# Altium PCB FLS ADC_A.PcbDoc (part 2 of 2)
Units mil, origin at the board's own origin, x right, y up, seen from the top; angles counter-clockwise.
Board outline 3421.65 x 2339.32 mil, 6 copper layers (Top Layer, Internal Plane 1, Mid-Layer 1, Mid-Layer 2, Internal Plane 2, Bottom Layer), stack 56.9 mil thick; 63 components, 71 nets, 345 pads, 98 vias.
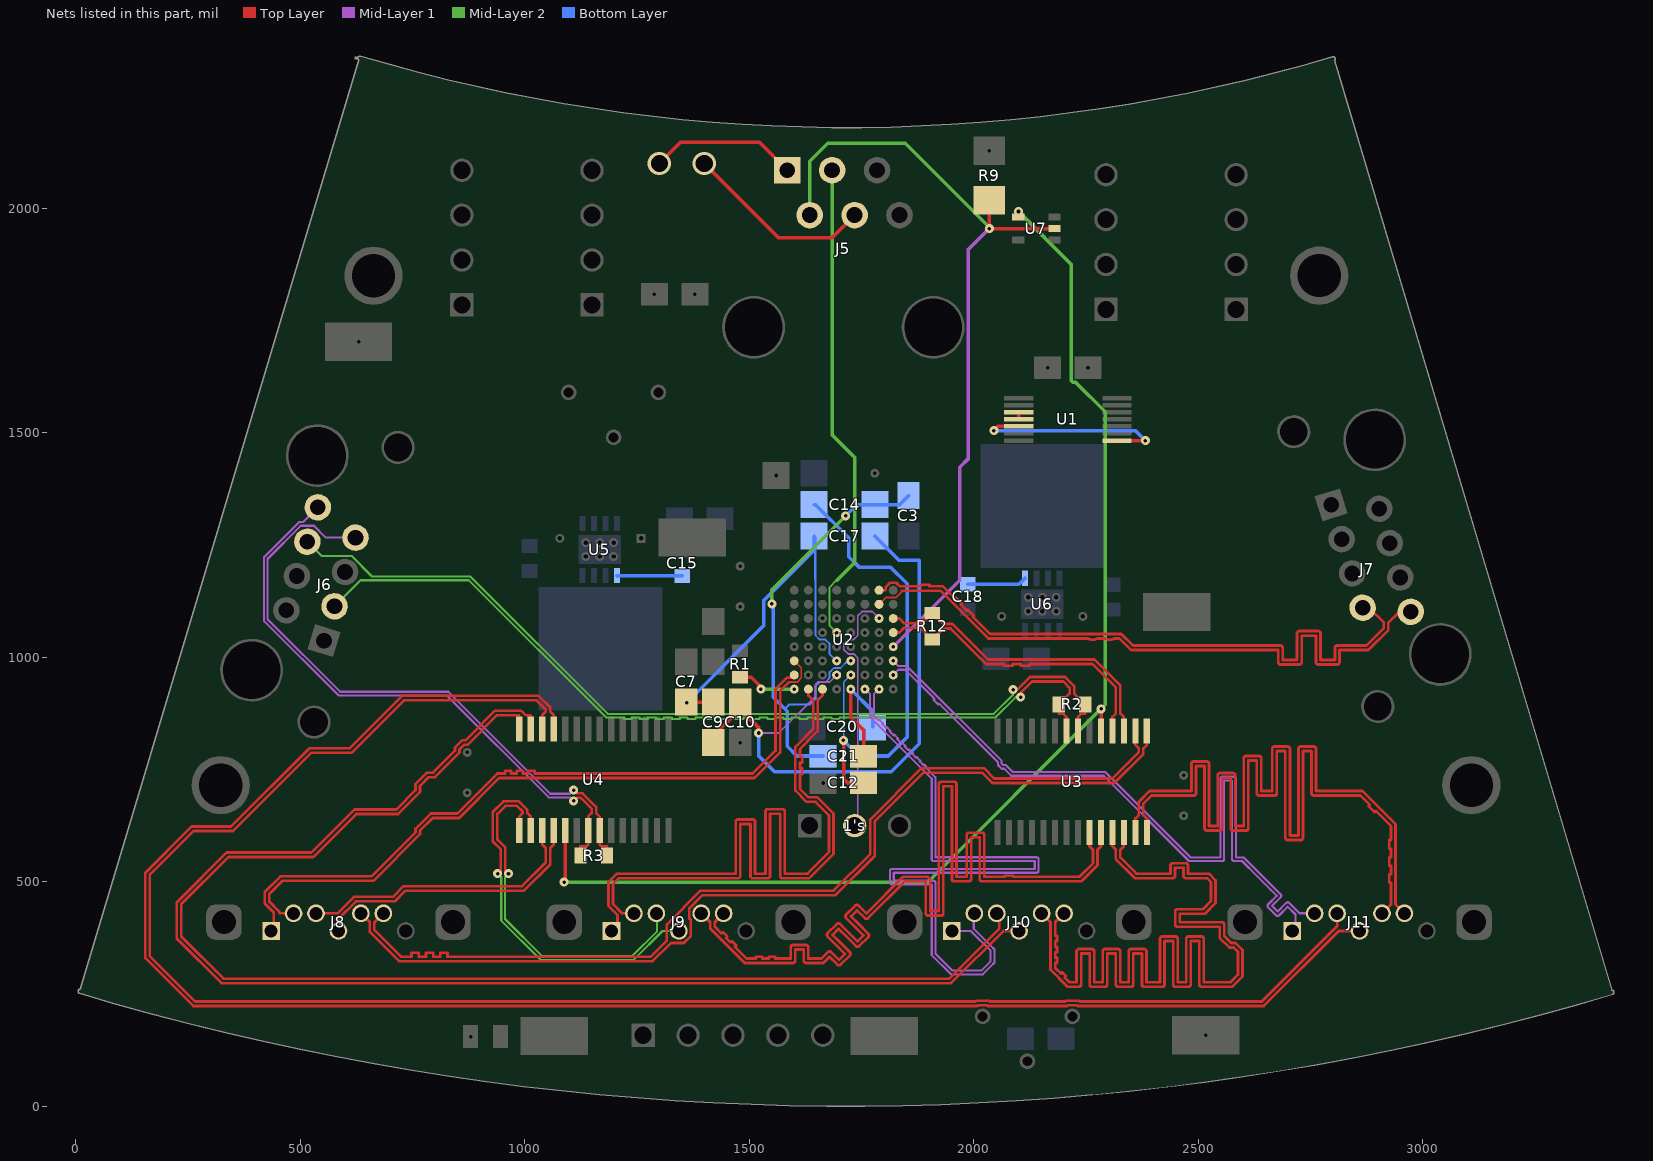
[diagram p6: the nets of this part, all layers, seen from the top]

## Via types
v1: diameter 52, hole 38, Top Layer to Bottom Layer, 52 vias
v2: diameter 20, hole 8, Top Layer to Bottom Layer, 35 vias
v3: diameter 18, hole 8, Top Layer to Bottom Layer, 10 vias
v4: diameter 22, hole 12, Top Layer to Bottom Layer, 1 vias

## Nets (pads, with @x,y where several pads share a name; then routed paths per layer and width w, separated by ;. In a path a pad name is that pad's centre, name@x,y a point inside that pad or via, vN(x,y) a via of type N, cw(c..) or ccw(c..) an arc to the next point about the centre after c; other vN are vias at no path point) (continued)
LVDS_CHANNEL_4_N: J7.7 U2.A7 | length 1484.4
  Top Layer w6.05: U2.A7@1789.49,1149.49 1802.72,1149.49 1804.46,1151.23 1804.46,1156.33 1814.14,1166.01 1827.83,1166.01 1835.81,1158.03 1836.34,1158.55 1882.77,1158.55 1882.77,1161.55 1901.82,1161.55 1901.82,1158.55 1930.39,1158.55 1958.33,1130.62 1960.45,1132.74 1973.92,1119.27 1971.8,1117.15 1985.27,1103.68 1987.39,1105.8 2000.86,1092.33 1998.74,1090.21 2037,1051.94 2329.06,1051.94 2354.89,1026.11 2683.65,1026.11 cw(c2683.65,1021.08) 2688.68,1021.08 2688.68,993.91 2720.72,993.91 2720.72,1053.28 cw(c2725.75,1053.28) 2725.75,1058.31 2767.85,1058.31 cw(c2767.85,1053.28) 2772.88,1053.28 2772.88,993.91 2804.93,993.91 2804.93,1021.08 cw(c2809.95,1021.08) 2809.95,1026.11 2875.11,1026.11 2914,1065 2914,1077 2880.78,1110.22 J7.7@2866.73,1110.22
LVDS_CHANNEL_4_P: J7.8 U2.B7 | length 1484.8
  Top Layer w4.25: U2.B7@1789.49,1117.99 1805.11,1133.62 1827.21,1133.62 1840,1146.41 1840,1148
  Top Layer w6.05: 1840,1148 1840.5,1148.5 1926.23,1148.5 2032.84,1041.89 2255.85,1041.89 ccw(c2265.38,1055.51) 2274.9,1041.89 2293.95,1041.89 ccw(c2303.47,1055.51) 2313,1041.89 2324.89,1041.89 2350.73,1016.06 2678.62,1016.06 2678.62,988.88 ccw(c2683.65,988.88) 2683.65,983.86 2725.75,983.86 ccw(c2725.75,988.88) 2730.78,988.88 2730.78,1048.26 2762.83,1048.26 2762.83,988.88 ccw(c2767.85,988.88) 2767.85,983.86 2809.95,983.86 ccw(c2809.95,988.88) 2814.98,988.88 2814.97,1016.06 2879.27,1016.06 2924.05,1060.84 2924.05,1077 2948.25,1101.2 J7.8@2974.06,1101.2
Net1's_2: 1's.2 U2.C7 | length 568
  Mid-Layer 1 w3.9: 1's.2@1735,625 1741.95,631.95 1741.95,998.41 1732.9,1007.46 1720.69,1007.46 1711.05,1017.1 1711.05,1029.9 1720.1,1038.95 1732.3,1038.95 1741.95,1048.6 1741.95,1092.3 1751.59,1101.95 1774.04,1101.95 U2.C7@1789.49,1086.5
NetC3_1: C3.1 C14.2 C21.1 U2.F5 | length 1058
  Mid-Layer 2 w8: v2(1550.72,1119) 1550.72,1150.72 v2(1715,1315)
  Bottom Layer w4: 1647.8,908.52 1647.8,935.52 1657.09,944.81 1670.1,944.81 1679.3,954.01 1679.3,967.02 1688.5,976.21 1703.62,976.21 1719.41,992.01 U2.F5@1726.5,992.01
  Bottom Layer w5: 1579.5,885 1589.5,895 1635,895 1648.16,908.16
  Bottom Layer w8: v2(1550.72,1119) 1553.75,1115.97 1553.75,910.75 1579.5,885 1585,879.5 1585,801.87 1606.87,780 C21.1@1665,780 ; v2(1715,1315) 1740,1340 C14.2@1780,1340 1835,1340 C3.1@1855,1360
NetC7_1: C7.1 C9.1 C17.2 U2.F4 | length 876.2
  Top Layer w8: C7.1@1360,921 C7.1@1360,900 C9.1@1420,900
  Bottom Layer w4: 1647.35,1175 1647.8,1174.55 1647.8,1048.5 1657,1039.3 1669.92,1039.3 1679.21,1030.01 1679.21,1017 1678.85,1016.64 1678.85,1008.16 U2.F4@1695,992.01
  Bottom Layer w5: C17.2@1645,1270 1647.35,1267.65 1647.35,1175
  Bottom Layer w8: v2(1361,899) 1532.72,1070.72 1532.72,1126.46 1645,1238.74 C17.2@1645,1270
NetC9_2: C9.2 C10.2 C17.1 U2.G4 | length 1407.8
  Top Layer w8: C9.2@1420,810 1420,825 C10.2@1480,884.72 ; C10.2@1480,900 C10.2@1480,884.72 ; v2(1521,831.28) 1521,843.72 C10.2@1480,884.72
  Mid-Layer 1 w4: v2(1521,831.28) 1566.28,831.28 1648,913 1648,940 1653,945 1679.49,945 U2.G4@1695,960.51
  Bottom Layer w8: v2(1521,831.28) 1521,780.72 1556.72,745 1816.72,745 1879,807.28 1879,1215.72 1834.28,1215.72 C17.1@1780,1270
NetC11_1: C11.1 C20.1 U2.H5 | length 264.9
  Top Layer w8: U2.H5@1726.5,929.02 1726.5,866.5 1755,838 C11.1@1755,780
  Bottom Layer w8: U2.H5@1726.5,929.02 1775,880.51 C20.1@1775,845
NetC12_2: C12.2 C14.1 C21.2 U2.G5 | length 1106.7
  Top Layer w8: v2(1710,815) 1710.72,814.28 1710.72,729 1719.72,720 C12.2@1755,720
  Bottom Layer w4: v2(1710,815) 1711,816 1711,945.01 U2.G5@1726.5,960.51
  Bottom Layer w8: C14.1@1645,1340 1647.73,1340 1721.72,1266.01 1721.72,1224 1744.72,1201 1814.72,1201 1852,1163.72 1852,822.28 1809.72,780 C21.2@1755,780 1745,780 v2(1710,815)
NetC15_1: C15.1 U5.5 | length 145.8
  Bottom Layer w8: U5.5@1205.39,1181.93 1350.51,1181.93 C15.1@1351,1181.44
NetC18_1: C18.1 U6.5 | length 133.2
  Bottom Layer w8: C18.1@1987,1162.56 2101.1,1162.56 U6.5@2114.61,1176.07
NetR1_2: R1.2 U2.H1 | length 129.3
  Top Layer w8: R1.2@1480,955.47 1504.72,955.47 v2@1525,935.19
  Mid-Layer 2 w8: v2@1525,930 v2(1525.98,929.02) U2.H1@1600.51,929.02
NetU1_3: U1.3 U1.4 | length 15.7
  Top Layer w8: U1.4@2100.75,1530 U1.3@2100.75,1545.75
NetU1_5: U1.5 U1.8 | length 470.1
  Top Layer w8: v2(2045,1505) 2054.25,1514.25 U1.5@2100.75,1514.25 ; U1.8@2319.25,1482.76 v2(2382.76,1482.76)
  Bottom Layer w8: v2(2045,1505) 2360.51,1505 v2(2382.76,1482.76)
PDWN: J5.2 R9.2 U2.E8 U7.2 | length 1845.4
  Top Layer w8: R9.2@2035,2017.88 v2(2035,1955) U7.2@2180.35,1955
  Mid-Layer 1 w8: U2.E8@1820.98,1023.5 1969,1171.52 1969,1423 1987.75,1441.75 1987.75,1907.75 v2(2035,1955)
  Mid-Layer 2 w8: J5.2@1635,1985 1635,2105 1675,2145 1848,2145 2035,1958 v2(2035,1955)
PDWN2: U3.5 U4.5 U7.4 | length 2716.3
  Top Layer w8: v2(1088,499) 1090.36,501.36 U4.5@1090.36,614 ; U3.5@2283.64,836 2284,836.36 v2(2284,885)
  Mid-Layer 2 w8: v2(1088,499) 1898,499 v2(2284,885) 2293.06,894.06 2293.06,1547.04 2227.85,1612.25 2221.79,1612.25 2217.25,1616.79 2217.25,1875.75 v2(2100,1993)
"PLL LOCK_A": J5.3 U2.D4 | length 1080.6
  Mid-Layer 2 w4: 1679.25,1156.02 1694.42,1171.19 1695,1171.19 ; 1679.3,1155.97 1679.3,1070.7 U2.D4@1695,1055
  Mid-Layer 2 w8: J5.3@1685,2085 1685,1495 1735,1445 1735,1211.19 1695,1171.19
START_A1_N: J8.4 U4.4 | length 627.7
  Top Layer w6.05: J8.4@585.12,390.32 585.12,417.46 624.05,456.4 710.61,456.4 734.21,480 998.21,480 1057,538.79 1057,575.23 1064.77,583 U4.4@1064.77,614
START_A1_P: J8.3 U4.3 | length 633
  Top Layer w6.05: J8.3@535.12,429.69 583.13,429.69 619.89,466.45 706.45,466.45 730.05,490.05 994.05,490.05 1046.95,542.95 1046.95,575.23 1039.18,583 U4.3@1039.18,614
START_A2_N: J9.4 U4.2 | length 857.9
  Top Layer w6.05: v2(940,518) 946.98,524.97 946.98,571.81 928.95,589.84 928.95,655.16 952.84,679.05 986.93,679.05 1005.82,660.16 1005.82,652.77 1013.59,645 U4.2@1013.59,614
  Mid-Layer 2 w4.8: v2(940,518) 947.85,510.15 947.85,413.41 1033.13,328.13 1035.56,325.7 1242.44,325.7 1244.87,328.13 1307.05,390.32 J9.4@1343.37,390.32
START_A2_P: J9.3 U4.1 | length 799.3
  Top Layer w6.05: v2(964,518) 957.03,524.97 957.03,575.97 939,594 939,651 957,669 982.77,669 995.77,656 995.77,652.77 988,645 U4.1@988,614
  Mid-Layer 2 w4.8: v2(964,518) 956.15,510.15 956.15,416.85 1039,334 1239,334 1295,390 1295,428.06 J9.3@1293.37,429.69
START_A3_N: J10.4 U4.27 | length 3059.2
  Top Layer w6.05: U4.27@1013.59,840.38 1013.59,871 1002.21,871 992.16,881.05 934.05,881.05 868.08,815.08 860.79,815.08 844.92,799.21 844.92,791.92 796.08,743.08 782.16,743.08 756.92,717.84 756.92,703.92 714,661 620.95,661 525,565.05 335.84,565.05 224.95,454.16 224.95,373.84 324.84,273.95 1950.16,273.95 2066.53,390.32 J10.4@2101.63,390.32
START_A3_P: J10.3 U4.28 | length 2986.2
  Top Layer w6.05: U4.28@987.99,840.38 987.99,871 938.21,871 872.24,805.03 864.95,805.03 854.97,795.05 854.97,787.76 800.24,733.03 786.32,733.03 766.97,713.68 766.97,699.76 718.16,650.95 625.11,650.95 529.16,555 340,555 235,450 235,378 329,284 1946,284 2057,395 2057,424.31 J10.3@2051.63,429.69
START_A4_N: J11.4 U4.25 | length 4138.2
  Top Layer w6.05: U4.25@1064.77,840.38 1064.77,871 1057,878.77 1057,888.16 1031.11,914.05 726.84,914.05 609.89,797.11 520.11,797.11 346,623 258,623 155.06,520.06 155.06,329.73 261.84,222.95 2008.27,222.95 2009.84,224.53 2030.16,224.53 2031.73,222.95 2208.27,222.95 2209.84,224.53 2230.16,224.53 2231.73,222.95 2646.16,222.95 2813.53,390.32 J11.4@2859.88,390.32
START_A4_P: J11.3 U4.26 | length 4067.2
  Top Layer w6.05: U4.26@1039.18,840.38 1039.18,871 1046.95,878.77 1046.95,884 1026.95,904 731,904 614.06,787.06 524.27,787.06 350.16,612.95 262.16,612.95 165.11,515.89 165.11,333.89 266,233 2004.1,233 2005.68,234.58 2034.32,234.58 2035.9,233 2204.1,233 2205.68,234.58 2234.32,234.58 2235.9,233 2642,233 2809.88,400.88 J11.3@2809.88,429.69
START_A_N: J6.7 R3.1 U4.8 | length 1409.4
  Top Layer w6.05: v2(1109,704) 1115.98,697.03 1129.16,697.03 1159.36,666.82 1159.36,652.77 1167.13,645 U4.8@1167.13,614 1167.13,583 1171.13,579 1183.53,579 R3.1@1183.53,558
  Mid-Layer 1 w4.8: J6.7@623.17,1266.51 556.93,1266.51 530.52,1292.93 501.17,1292.93 427.24,1219 427.24,1085.06 589,923.3 829.7,923.3 1056.85,696.15 1101.15,696.15 v2(1109,704)
START_A_P: J6.8 R3.2 U4.7 | length 1339.6
  Top Layer w6.05: v2(1109,680) 1115.98,686.97 1125,686.97 1149.31,662.66 1149.31,652.77 1141.54,645 U4.7@1141.54,614 1141.54,583 1137.54,579 1124.47,579 R3.2@1124.47,558
  Mid-Layer 1 w4.8: J6.8@539.23,1334 506.46,1301.23 497.73,1301.23 418.94,1222.44 418.94,1081.62 585.56,915 826.26,915 1053.41,687.85 1101.15,687.85 v2(1109,680)
SYS_CLK_A1_N: J8.6 U3.2 | length 2152
  Top Layer w6.05: J8.6@685.12,429.69 665.14,409.71 665.14,392 724.14,333 748.03,333 748.03,342 764.08,342 764.08,333 780.12,333 780.12,342 796.17,342 796.17,333 812.23,333 812.23,342 828.28,342 828.28,333 1281,333 1316.66,368.66 1316.66,404.96 1391.75,480.05 1688.05,480.05 1770,562 1770,639 1884.05,753.05 2022.95,753.05 2046,730 2309.18,730 2368.18,789 2368.18,797.23 2360.41,805 U3.2@2360.41,836
SYS_CLK_A1_P: J8.5 U3.1 | length 2150.9
  Top Layer w6.05: J8.5@635.12,429.69 655.09,409.71 655.09,387.84 719.98,322.95 1285.16,322.95 1325.82,363.61 1354.44,363.61 1370.08,379.25 1370.08,415.2 1366.66,418.62 1366.66,440.75 1395.91,470 1692.21,470 1780.05,557.84 1780.05,634.84 1888.21,743 2018.79,743 2041.84,719.95 2313.34,719.95 2378.23,784.84 2378.23,797.23 2386,805 U3.1@2386,836
SYS_CLK_A2_N: J9.6 U3.23 | length 2151.1
  Top Layer w6.05: J9.6@1443.37,429.69 1423.4,409.71 1423.4,400 1438.67,384.73 1441.49,387.56 1451.43,377.62 1448.6,374.8 1458.54,364.86 1461.36,367.69 1471.3,357.76 1468.47,354.93 1494.4,329 1515.47,329 1515.47,333 1529.52,333 1529.52,329 1543.57,329 1543.57,333 1557.62,333 1557.62,329 1592.53,329 1592.53,353.97 cw(c1597.55,353.97) 1597.55,359 1626.65,359 cw(c1626.65,353.97) 1631.68,353.97 1631.68,329 1661,329 1675.5,343.5 cw(c1679.06,339.96) 1682.62,343.5 1700.28,325.85 1713.75,339.32 1696.09,356.97 ; 1696.09,356.98 1674.88,378.18 cw(c1678.43,381.75) 1674.86,385.29 1695.44,405.87 cw(c1699,402.32) 1702.56,405.87 1723.76,384.67 1741.43,367 1754.9,380.47 1737.24,398.13 1716.04,419.34 cw(c1719.58,422.9) 1716.02,426.44 1736.59,447.02 cw(c1740.16,443.48) 1743.72,447.02 1761.37,429.37 1843.05,511.05 1897.62,511.05 1903.68,505 1903.68,434.64 1922.72,434.64 1922.72,717.71 cw(c1927.75,717.71) 1927.75,722.73 1956.85,722.73 cw(c1956.85,717.71) 1961.88,717.71 1961.88,511.05 1984.53,511.05 1984.53,604.35 cw(c1989.55,604.35) 1989.55,609.38 2018.65,609.38 cw(c2018.65,604.35) 2023.68,604.35 2023.68,511.05 2069.53,511.05 2069.53,513.05 2088.58,513.05 2088.58,511.05 2236.05,511.05 2265.82,540.82 2265.82,571.23 2258.05,579 U3.23@2258.05,609.62
SYS_CLK_A2_P: J9.5 U3.24 | length 2149.9
  Top Layer w6.05: J9.5@1393.37,429.69 1413.35,409.71 1413.35,395.84 1490.23,318.95 1597.55,318.95 ccw(c1597.55,323.97) 1602.58,323.97 1602.58,348.95 1621.62,348.95 1621.62,323.97 ccw(c1626.65,323.97) 1626.65,318.95 1665.16,318.95 1679.06,332.85 1696.71,315.2 ccw(c1700.28,318.74) 1703.82,315.18 1724.4,335.76 ccw(c1720.85,339.32) 1725.88,339.32 ccw(c1720.85,339.32) 1724.41,342.86 ; 1703.19,364.09 1685.53,381.75 1699,395.22 1716.65,377.57 1737.87,356.35 ccw(c1741.43,359.9) 1744.97,356.33 1765.55,376.91 ccw(c1762.01,380.47) 1767.03,380.47 ccw(c1762.01,380.47) 1765.57,384.02 ; 1703.2,364.08 1724.4,342.88 ; 1765.55,384.04 1744.35,405.23 1726.69,422.9 1740.16,436.37 1757.81,418.72 ccw(c1761.37,422.26) 1764.91,418.7 1847.21,501 1893.46,501 1893.62,500.84 1893.62,429.61 ccw(c1898.65,429.61) 1898.65,424.59 1927.75,424.59 ccw(c1927.75,429.61) 1932.78,429.61 1932.78,712.68 1951.83,712.68 1951.83,506.03 ccw(c1956.85,506.03) 1956.85,501 1989.55,501 ccw(c1989.55,506.03) 1994.58,506.03 1994.58,599.33 2013.62,599.33 2013.62,506.03 ccw(c2018.65,506.03) 2018.65,501 2240.21,501 2275.87,536.66 2275.87,571.23 2283.64,579 U3.24@2283.64,609.62
SYS_CLK_A3_N: J10.6 U3.25 | length 2150.3
  Top Layer w6.05: J10.6@2201.63,429.69 2181.65,409.71 2181.65,379.46 2185.65,379.46 2185.65,367.36 2181.65,367.36 2181.65,355.26 2185.65,355.26 2185.65,343.16 2181.65,343.16 2181.65,331.06 2185.65,331.06 2185.65,318.96 2181.65,318.96 2181.65,308.35 2194.49,295.51 2197.32,298.34 2205.87,289.79 2203.04,286.96 2214,276 2229.53,276 2229.53,344.97 cw(c2234.55,344.97) 2234.55,350 2263.65,350 cw(c2263.65,344.97) 2268.68,344.97 2268.68,276 2287.72,276 2287.72,344.97 cw(c2292.75,344.97) 2292.75,350 2321.85,350 cw(c2321.85,344.97) 2326.88,344.97 2326.88,276 2345.93,276 2345.93,344.97 cw(c2350.95,344.97) 2350.95,350 2380.05,350 cw(c2380.05,344.97) 2385.08,344.97 2385.08,276 2415.53,276 2415.53,372.97 cw(c2420.55,372.97) 2420.55,378 2449.65,378 cw(c2449.65,372.97) 2454.68,372.97 2454.68,276 2473.72,276 2473.72,372.97 cw(c2478.75,372.97) 2478.75,378 2507.85,378 cw(c2507.85,372.97) 2512.88,372.97 2512.88,276 2572,276 2589,293 2589,344.03 2579.47,353.56 2569.85,353.56 2548.32,375.09 2548.32,399.53 2454.09,399.53 cw(c2454.09,404.55) 2449.06,404.55 2449.06,433.65 cw(c2454.09,433.65) 2454.09,438.68 2511,438.67 2529,456.67 2529,499 2520,508 2472.65,508 cw(c2472.65,513.03) 2467.62,513.03 2467.62,531 2448.58,531 2448.58,513.03 cw(c2443.55,513.03) 2443.55,508 2359,508 2317,550 2317,571.23 2309.23,579 U3.25@2309.23,609.62
SYS_CLK_A3_P: J10.5 U3.26 | length 2150.3
  Top Layer w6.05: J10.5@2151.63,429.69 2171.6,409.71 2171.6,304.18 2209.84,265.95 2234.55,265.95 ccw(c2234.55,270.97) 2239.58,270.97 2239.58,339.95 2258.62,339.95 2258.62,270.97 ccw(c2263.65,270.97) 2263.65,265.95 2292.75,265.95 ccw(c2292.75,270.97) 2297.78,270.97 2297.78,339.95 2316.83,339.95 2316.83,270.97 ccw(c2321.85,270.97) 2321.85,265.95 2350.95,265.95 ccw(c2350.95,270.97) 2355.98,270.97 2355.97,339.95 2375.03,339.95 2375.03,270.97 ccw(c2380.05,270.97) 2380.05,265.95 2420.55,265.95 ccw(c2420.55,270.97) 2425.58,270.97 2425.58,367.95 2444.62,367.95 2444.62,270.97 ccw(c2449.65,270.97) 2449.65,265.95 2478.75,265.95 ccw(c2478.75,270.97) 2483.78,270.97 2483.78,367.95 2502.83,367.95 2502.83,270.97 ccw(c2507.85,270.97) 2507.85,265.95 2576.16,265.95 2599.05,288.84 2599.05,348.19 2583.63,363.61 2574.02,363.61 2558.37,379.25 2558.37,404.55 ccw(c2553.34,404.55) 2553.34,409.58 2459.11,409.58 2459.11,428.62 2515.16,428.62 2539.05,452.51 2539.05,503.16 2524.16,518.05 2477.68,518.05 2477.68,536.03 ccw(c2472.65,536.03) 2472.65,541.05 2443.55,541.05 ccw(c2443.55,536.03) 2438.53,536.03 2438.53,518.05 2363.16,518.05 2327.05,554.16 2327.05,571.23 2334.82,579 U3.26@2334.82,609.62
SYS_CLK_A4_N: J11.6 U3.27 | length 2143.5
  Top Layer w6.05: U3.27@2360.42,609.62 2360.42,641 2368.19,648.77 2368.19,678.16 2392.07,702.05 2485.53,702.05 2485.53,762.91 cw(c2490.55,762.91) 2490.55,767.94 2519.65,767.94 cw(c2519.65,762.91) 2524.68,762.91 2524.68,624.05 2543.72,624.05 2543.72,736.95 cw(c2548.75,736.95) 2548.75,741.98 2577.85,741.98 cw(c2577.85,736.95) 2582.88,736.95 2582.88,624.05 2601.93,624.05 2601.93,775.03 cw(c2606.95,775.03) 2606.95,780.05 2636.05,780.05 cw(c2636.05,775.03) 2641.08,775.03 2641.08,702.05 2665.53,702.05 2665.53,796.13 cw(c2670.55,796.13) 2670.55,801.15 2699.65,801.15 cw(c2699.65,796.13) 2704.68,796.13 2704.68,602.95 2723.72,602.95 2723.72,796.13 cw(c2728.75,796.13) 2728.75,801.15 2757.85,801.15 cw(c2757.85,796.13) 2762.88,796.13 2762.88,702.05 2866.16,702.05 2939.91,628.31 2939.91,449.66 J11.6@2959.88,429.69
SYS_CLK_A4_P: J11.5 U3.28 | length 2142.2
  Top Layer w6.05: U3.28@2386.01,609.62 2386.01,641 2378.24,648.77 2378.24,674 2396.24,692 2490.55,692 ccw(c2490.55,697.03) 2495.58,697.03 2495.58,757.89 2514.62,757.89 2514.62,619.03 ccw(c2519.65,619.03) 2519.65,614 2548.75,614 ccw(c2548.75,619.03) 2553.78,619.03 2553.78,731.93 2572.83,731.93 2572.83,619.03 ccw(c2577.85,619.03) 2577.85,614 2606.95,614 ccw(c2606.95,619.03) 2611.98,619.03 2611.97,770 2631.03,770 2631.03,697.03 ccw(c2636.05,697.03) 2636.05,692 2670.55,692 ccw(c2670.55,697.03) 2675.58,697.03 2675.58,791.1 2694.62,791.1 2694.62,597.92 ccw(c2699.65,597.92) 2699.65,592.9 2728.75,592.9 ccw(c2728.75,597.92) 2733.78,597.92 2733.78,791.1 2752.83,791.1 2752.83,697.03 ccw(c2757.85,697.03) 2757.85,692 2862,692 2882.71,671.29 2879.88,668.46 2893.35,654.99 2896.18,657.82 2929.86,624.14 2929.86,592.78 2925.86,592.78 2925.86,573.72 2929.86,573.72 2929.86,554.67 2925.86,554.67 2925.86,535.62 2929.86,535.62 2929.86,516.58 2925.86,516.58 2925.86,497.53 2929.86,497.53 2929.86,449.66 J11.5@2909.88,429.69
SYS_CLK_A_N: J6.3 R2.1 U3.8 | length 2036.6
  Top Layer w6.05: v2(2104.98,911.02) 2104.98,920.88 2130.1,946 2199.97,946 2213.97,932 2213.97,919.5 R2.1@2189.47,895 2189.47,874 2199.87,874 2206.87,867 U3.8@2206.87,836
  Mid-Layer 2 w4.8: J6.3@576.39,1113.5 634.45,1171.57 875.69,1171.57 1181.56,865.7 1194,865.7 1202.9,865.7 1220.7,865.7 1220.7,862.7 1238.5,862.7 1238.5,865.7 1256.3,865.7 1256.3,862.7 1274.1,862.7 1274.1,865.7 1291.9,865.7 1291.9,862.7 1309.7,862.7 1309.7,865.7 1327.5,865.7 1327.5,862.7 1345.3,862.7 1345.3,865.7 1363.1,865.7 1363.1,862.7 1380.9,862.7 1380.9,865.7 1398.7,865.7 1398.7,862.7 1416.5,862.7 1416.5,865.7 1434.3,865.7 1434.3,862.7 1452.1,862.7 1452.1,865.7 1469.9,865.7 1469.9,862.7 1487.7,862.7 1487.7,865.7 1505.5,865.7 1505.5,862.7 1523.3,862.7 1523.3,865.7 1541.1,865.7 1541.1,862.7 1558.9,862.7 1558.9,865.7 1576.7,865.7 1576.7,862.7 1594.5,862.7 1594.5,865.7 1612.3,865.7 1612.3,862.7 1630.1,862.7 1630.1,865.7 1647.9,865.7 1647.9,862.7 1665.7,862.7 1665.7,865.7 1683.5,865.7 1683.5,862.7 1701.3,862.7 1701.3,865.7 1719.1,865.7 1724,865.7 2048.57,865.7 2093.88,911.02 v2(2104.98,911.02)
SYS_CLK_A_P: J6.6 R2.2 U3.7 | length 2038
  Top Layer w6.05: v2(2088.01,927.99) 2097.88,927.99 2125.94,956.05 2204.14,956.05 2224.02,936.16 2224.02,919.5 R2.2@2248.53,895 2248.53,874 2239.46,874 2232.46,867 U3.7@2232.46,836
  Mid-Layer 2 w4.8: J6.6@515.84,1257.5 547.91,1225.44 614.45,1225.44 660.02,1179.87 879.13,1179.87 1185,874 2045.13,874 2088.01,916.88 v2(2088.01,927.99)
SYS_CLK_ADC_A_N: R12.1 U2.D8 U3.4 | length 692
  Top Layer w6.05: U2.D8@1820.98,1055 1834.72,1055 1845.44,1065.72 1881.75,1065.72 R12.1@1908,1039.47 1932.5,1063.97 1949.03,1063.97 2028.05,984.95 2067.58,984.95 2067.58,980.95 2086.62,980.95 2086.62,984.95 2105.68,984.95 2105.68,980.95 2124.72,980.95 2124.72,984.95 2265.05,984.95 2317,933 2317,874.77 2309.23,867 U3.4@2309.23,836
SYS_CLK_ADC_A_P: R12.2 U2.C8 U3.3 | length 691.2
  Top Layer w6.05: U2.C8@1820.98,1086.5 1834.72,1086.5 1845.44,1075.77 1885.25,1075.77 R12.2@1908,1098.53 1932.5,1074.03 1953.19,1074.03 2032.21,995 2269.21,995 2327.05,937.16 2327.05,874.77 2334.82,867 U3.3@2334.82,836
T18: J5.4 | length 424.1
  Top Layer w8: v1(1400,2100) 1565,1935 1685,1935 J5.4@1735,1985
V17: J5.1 | length 330.1
  Top Layer w8: v1(1300,2100) 1347,2147 1523,2147 J5.1@1585,2085
"VIDEO A1_N": J8.2 U2.F1 | length 1596.9
  Top Layer w4.25: 1590,944.64 1606.74,944.64 1616.14,954.04 1616.14,976.38 U2.F1@1600.51,992.01
  Top Layer w6.05: J8.2@485.12,429.69 455.31,429.69 453,432 453,434 431,456 431,473 460,502 663,502 766.97,605.97 766.97,613.68 795.25,641.95 854.24,641.95 943.16,730.87 1512.08,730.87 1569.05,787.84 1569.05,925 1588.69,944.64 1590,944.64
"VIDEO A1_P": J8.1 U2.G1 | length 1598.3
  Top Layer w6.05: J8.1@435.12,390.32 440.79,395.99 440.79,432 420.95,451.84 420.95,477.16 455.84,512.05 658.84,512.05 756.92,610.14 756.92,617.84 791.08,652 850.08,652 939,740.92 956.53,740.92 956.53,746.92 969.58,746.92 969.58,740.92 982.62,740.92 982.62,746.92 995.67,746.92 995.67,740.92 1008.73,740.92 1008.73,746.92 1021.78,746.92 1021.78,740.92 1507.92,740.92 1559,792 1559,929.16 1584.53,954.69 1594.16,954.69 1594.43,954.43 U2.G1@1600.51,960.51
"VIDEO A2_N": J9.2 U2.H3 | length 1591.3
  Top Layer w6.05: J9.2@1243.37,429.69 1217.31,429.69 1197,450 1197,495 1209.95,507.95 1477.16,507.95 1480.11,510.89 1480.11,628.7 1503.16,628.7 1503.16,510.89 1506.1,507.95 1543.36,507.95 1546.31,510.89 1546.31,651.65 1569.36,651.65 1569.36,510.89 1572.3,507.95 1634.16,507.95 1688.05,561.84 1688.05,651.95 1652.03,687.97 1632.09,687.97 1613.11,706.96 1613.11,739.33 1618.11,739.33 1618.11,752.38 1613.11,752.38 1613.11,765.42 1618.11,765.42 1618.11,778.47 1613.11,778.47 1613.11,795.89 1652.78,835.57 1652.78,904.28 1663.5,915 U2.H3@1663.5,929.02
"VIDEO A2_P": J9.1 U2.H2 | length 1590.1
  Top Layer w6.05: J9.1@1193.37,390.32 1206.89,403.84 1206.89,425.89 1186.95,445.84 1186.95,499.16 1205.79,518 1470.06,518 1470.06,635.8 1473,638.75 1510.26,638.75 1513.21,635.8 1513.21,518 1536.26,518 1536.26,658.76 1539.2,661.7 1576.46,661.7 1579.41,658.76 1579.41,518 1630,518 1678,566 1678,647.79 1647.86,677.92 1627.93,677.92 1603.06,702.8 1603.06,800.06 1642.73,839.73 1642.73,904.28 1632.01,915 U2.H2@1632.01,929.02
"VIDEO A3_N": J10.2 U2.H6 | length 1591.2
  Mid-Layer 1 w4.8: U2.H6@1757.99,929.02 1769.59,917.42 1769.59,866.67 1906.7,729.56 1906.7,550.25 ccw(c1910.85,550.25) 1910.85,546.1 2136.3,546.1 2136.3,528.3 1818.05,528.3 ccw(c1818.05,524.15) 1813.9,524.15 1813.9,498.05 ccw(c1818.05,498.05) 1818.05,493.9 1906.7,493.9 1906.7,336.56 1949.56,293.7 2020.44,293.7 2043.87,317.13 2046.3,319.56 2046.3,349.44 2043.87,351.87 2000.37,395.37 2000.37,428.43 J10.2@2001.63,429.69
"VIDEO A3_P": J10.1 U2.H7 | length 1593.2
  Mid-Layer 1 w4.8: U2.H7@1789.49,929.02 1777.89,917.42 1777.89,870.11 1788.17,859.83 1789.59,861.24 1797.93,852.9 1796.52,851.48 1804.86,843.14 1806.27,844.55 1814.62,836.21 1813.2,834.8 1821.55,826.45 1822.96,827.87 1831.31,819.52 1829.89,818.11 1838.24,809.77 1839.65,811.18 1847.99,802.84 1846.58,801.42 1854.92,793.08 1856.34,794.49 1864.68,786.15 1863.27,784.73 1871.61,776.39 1873.02,777.8 1881.37,769.46 1879.95,768.05 1888.3,759.7 1889.71,761.12 1898.06,752.77 1896.64,751.36 1915,733 1915,554.4 2140.45,554.4 cw(c2140.45,550.25) 2144.6,550.25 2144.6,524.15 cw(c2140.45,524.15) 2140.45,520 1822.2,520 1822.2,502.2 1910.85,502.2 cw(c1910.85,498.05) 1915,498.05 1915,340 1953,302 2017,302 2038,323 2038,346 1993.68,390.32 J10.1@1951.63,390.32
"VIDEO A4_N": J11.2 U2.F8 | length 1590.2
  Mid-Layer 1 w4.8: U2.F8@1820.98,992.01 1832.58,980.41 1851.44,980.41 2062.59,769.26 2062.59,763.56 2066.19,759.95 2071.89,759.95 2087.55,744.3 2293.44,744.3 2483.44,554.3 2549.87,554.3 2549.87,729.71 cw(c2554.02,729.71) 2554.02,733.86 2580.12,733.86 cw(c2580.12,729.71) 2584.27,729.71 2584.27,554.3 2601.44,554.3 2615.7,540.04 2629.1,526.64 2651.3,504.44 2664.7,491.04 2684.19,471.55 cw(c2681.25,468.62) 2685.4,468.62 cw(c2681.25,468.62) 2684.19,465.68 2664.82,446.32 2677.41,433.73 2696.77,453.1 cw(c2699.71,450.16) 2702.64,453.1 2726.05,429.69 J11.2@2759.88,429.69
"VIDEO A4_P": J11.1 U2.G8 | length 1590.7
  Mid-Layer 1 w4.8: U2.G8@1820.98,960.51 1832.58,972.11 1848,972.11 1912.81,907.3 1910.69,905.18 1921.15,894.72 1923.27,896.84 2054.29,765.82 2054.29,760.12 2062.75,751.65 2068.46,751.65 2084.11,736 2290,736 2480,546 2554.02,546 ccw(c2554.02,550.15) 2558.17,550.15 2558.17,725.56 2575.97,725.56 2575.97,550.15 ccw(c2580.12,550.15) 2580.12,546 2598,546 2606.9,537.1 2623.23,520.77 2645.43,498.57 2661.77,482.23 2675.38,468.62 2656.02,449.25 ccw(c2658.95,446.32) 2656.02,443.38 2674.47,424.93 ccw(c2677.41,427.86) 2680.34,424.93 2699.71,444.29 2717,427 2717,397.43 J11.1@2709.88,390.32
pads on no net: J5.MH1 J5.MH2 J6.MH1 J6.MH2 J7.MH1 J7.MH2 J12.5 U1.11 U2.A2 U2.A4 U2.A6 U2.A8 U2.B2 U2.B4 U2.B6 U2.B8 U2.D1 U2.D2 U3.11 U3.12 U3.13 U3.14 U3.15 U3.16 U3.17 U3.18 U3.19 U3.20 U4.11 U4.12 U4.13 U4.14 U4.15 U4.16 U4.17 U4.18 U4.19 U4.20 U4.23 U4.24 U5.7 U6.7 U7.1
copper on no net:
  other v1: 642,163 742,163 2700,200 2800,200 2900,200 500,600 700,600 800,600 3000,600 2648,621 2858,626 500,700 800,700 3000,700 2800,800 2896,800 3000,800 1100,1400 1200,1400 1300,1400 1400,1400 1008,1413 800,1500 900,1500 1000,1500 1400,1500 2600,1500 700,1600 800,1600 900,1600 1000,1600 1400,1600 2600,1600 2700,1600 800,1700 900,1700 1000,1700 2600,1700 2700,1700 2800,1700 2900,1700 700,2000 1400,2000 2700,2000 700,2100 2700,2100 700,2200 2700,2200

## Polygon pours and split planes (outlines as drawn)
AGND on Bottom Layer "Bottom Layer-AGND" (solid, pour order 17): 1433.48,559 ccw(c1441,559) 1441,551.48 1903,551.48 ccw(c1903,559) 1910.51,559 1910.51,731.89 1914.11,735.48 2543,735.48 ccw(c2543,743) 2550.51,743 2550.51,1213 ccw(c2543,1213) 2548.31,1218.31 2548.3,1218.32 cw(c2543,1213) 2548.32,1218.3 2538.3,1228.32 cw(c2533,1223) 2538.32,1228.3 2538.31,1228.31 ccw(c2533,1223) 2533,1230.51 2432.51,1230.51 2432.51,1383 ccw(c2425,1383) 2425,1390.51 1441,1390.51 ccw(c1441,1383) 1433.48,1383
GND on Bottom Layer "Bottom Layer-GND" (solid, remove dead copper, pour order 20): 0,0 0,2350 3450,2350 3450,-20
GND on Mid-Layer 2 "Mid Layer 2-GND" (solid, remove dead copper, pour order 21): 0,0 0,2350 3450,2350 3450,-20
AGND on Mid-Layer 2 "Mid Layer 2-AGND" (solid, pour order 19): 1433.48,559 ccw(c1441,559) 1441,551.48 1903,551.48 ccw(c1903,559) 1910.51,559 1910.51,731.89 1914.11,735.48 2543,735.48 ccw(c2543,743) 2550.51,743 2550.51,1213 ccw(c2543,1213) 2548.31,1218.31 2548.3,1218.32 cw(c2543,1213) 2548.32,1218.3 2538.3,1228.32 cw(c2533,1223) 2538.32,1228.3 2538.31,1228.31 ccw(c2533,1223) 2533,1230.51 2432.51,1230.51 2432.51,1383 ccw(c2425,1383) 2425,1390.51 1441,1390.51 ccw(c1441,1383) 1433.48,1383
GND on Mid-Layer 1 "Mid Layer 1-GND" (solid, remove dead copper, pour order 22): 0,0 0,2350 3450,2350 3450,-20
GND on Top Layer "Top Layer-GND" (solid, remove dead copper, pour order 23): 0,20 0,2370 3450,2370 3450,0
3VCCD on Internal Plane 1 (split plane): 650.52,2313.65 702.63,2298.75 754.94,2284.6 807.45,2271.2 860.15,2258.55 913.02,2246.65 966.05,2235.51 1019.24,2225.12 1072.57,2215.5 1126.04,2206.64 1179.62,2198.55 1233.32,2191.22 1287.11,2184.66 1341,2178.86 1394.96,2173.84 1448.98,2169.59 1503.06,2166.11 1557.19,2163.4 1611.35,2161.47 1665.53,2160.31 1719.72,2159.92 1773.91,2160.31 1828.09,2161.47 1882.25,2163.4 1936.38,2166.11 1990.46,2169.59 2044.48,2173.84 2098.44,2178.86 2152.33,2184.66 2206.12,2191.22 2259.82,2198.55 2313.4,2206.64 2366.87,2215.5 2420.2,2225.12 2473.39,2235.51 2526.42,2246.65 2579.29,2258.55 2631.99,2271.2 2684.5,2284.6 2736.81,2298.75 2787.88,2313.35 3399.97,262.85 3343.91,246.55 3277.87,228.17 3211.63,210.56 3145.18,193.71 3078.54,177.63 3011.73,162.32 2944.74,147.79 2877.58,134.03 2810.28,121.04 2742.82,108.83 2675.23,97.41 2607.52,86.76 2539.68,76.9 2471.73,67.82 2403.69,59.53 2335.55,52.02 2267.33,45.3 2199.04,39.37 2130.69,34.23 2062.28,29.88 1993.82,26.32 1925.33,23.55 1856.81,21.57 1788.27,20.38 1719.72,19.99 1651.17,20.38 1582.63,21.57 1514.11,23.55 1445.62,26.32 1377.16,29.88 1308.75,34.23 1240.4,39.37 1172.11,45.3 1103.89,52.02 1035.75,59.53 967.71,67.82 899.76,76.9 831.92,86.76 764.21,97.41 696.62,108.83 629.16,121.04 561.86,134.03 494.7,147.79 427.71,162.32 360.9,177.63 294.26,193.71 227.81,210.56 161.57,228.17 95.53,246.55 31.92,265.05 646.49,2314.86
3VCCA on Internal Plane 2 (split plane): 2126.44,1223 2126.44,1048.56 1940,1048.56 1938.04,1048.31 1936.22,1047.55 1934.65,1046.35 1897.65,1009.35 1896.45,1007.78 1895.69,1005.96 1895.44,1004 1895.44,566.56 1448.56,566.56 1448.56,1375.44 2126.44,1375.44
5V0 on Internal Plane 2 (split plane): 650.52,2313.65 702.63,2298.75 754.94,2284.6 807.45,2271.2 860.15,2258.55 913.02,2246.65 966.05,2235.51 1019.24,2225.12 1072.57,2215.5 1126.04,2206.64 1179.62,2198.55 1233.32,2191.22 1287.11,2184.66 1341,2178.86 1394.96,2173.84 1448.98,2169.59 1503.06,2166.11 1557.19,2163.4 1611.35,2161.47 1665.53,2160.31 1719.72,2159.92 1773.91,2160.31 1828.09,2161.47 1882.25,2163.4 1936.38,2166.11 1990.46,2169.59 2044.48,2173.84 2098.44,2178.86 2152.33,2184.66 2206.12,2191.22 2259.82,2198.55 2313.4,2206.64 2366.87,2215.5 2420.2,2225.12 2473.39,2235.51 2526.42,2246.65 2579.29,2258.55 2631.99,2271.2 2684.5,2284.6 2736.81,2298.75 2787.88,2313.35 3399.97,262.85 3343.91,246.55 3277.87,228.17 3211.63,210.56 3145.18,193.71 3078.54,177.63 3011.73,162.32 2944.74,147.79 2877.58,134.03 2810.28,121.04 2742.82,108.83 2675.23,97.41 2607.52,86.76 2539.68,76.9 2471.73,67.82 2403.69,59.53 2335.55,52.02 2267.33,45.3 2199.04,39.37 2130.69,34.23 2062.28,29.88 1993.82,26.32 1925.33,23.55 1856.81,21.57 1788.27,20.38 1719.72,19.99 1651.17,20.38 1582.63,21.57 1514.11,23.55 1445.62,26.32 1377.16,29.88 1308.75,34.23 1240.4,39.37 1172.11,45.3 1103.89,52.02 1035.75,59.53 967.71,67.82 899.76,76.9 831.92,86.76 764.21,97.41 696.62,108.83 629.16,121.04 561.86,134.03 494.7,147.79 427.71,162.32 360.9,177.63 294.26,193.71 227.81,210.56 161.57,228.17 95.53,246.55 31.92,265.05 646.49,2314.86

## Keep-outs
Keep-Out Layer:
  lines w10: 633.45,2334.44 ccw(c1719.74,5977.91) 2800.93,2332.93
  lines w18: 633.45,2334.44 10.26,255.86 ccw(c1719.79,6068.06) 3421.63,253.6 2800.93,2332.93

## Other copper
Top Layer:
  text "GND" at 220,830 h36
Mid-Layer 1:
  text "GND" at 90,295 h36
Mid-Layer 2:
  text "AGND" at 1846,1336 h36 r270
  text "GND" at 90,295 h36
Bottom Layer:
  text "AGND" at 1952,1222 h36 r90
  text "GND" at 90,295 h36
Internal Plane 2 (plane layer: these items are gaps in the copper):
  lines w15: 1441,559 1763,559 1903,559 1903,1004 1940,1041 2134,1041 2134,1223 2134,1383 1441,1383 1441,559
  text "3VCCA" at 1517,587 h36 r90
  text "5V0" at 92,296 h36
Internal Plane 1 (plane layer: these items are gaps in the copper):
  text "3VCCD" at 90,295 h36

## Silkscreen, mask and mechanical layers (free items; w line width, h text height)
Top Overlay:
  lines w8: 1553.27,881.77 1553.27,1103.27 ; 1553.27,1138.27 1553.27,1196.73 1868.23,1196.73 1868.23,1081.77 ; 1868.23,881.77 1868.23,1048.23
  text "GND" at 544,1647 h36 r90
  text "3VCCA" at 2351,1161 h36
  text "3VCCD" at 1097,1155 h36
  text "+" at 2485,953 h36
  text "-" at 2484,882 h36
  text "J13" at 2511,868 h36
  text "-" at 2493,823 h36
  text "+" at 2492,754 h36
  text "Make J13 1.5in" at 2493,712 h36
  text "> imager cable." at 2493,659 h36
  text "O_B" at 1900,605 h36
  text "M2FS: MICHIGAN MAGELLAN FIBER SPECTROGRAPH" at 788,228 h36
  text "FLS ADC" at 2412,224 h36
  text "VOCM" at 2295,180 h36
  text "~1.5V" at 2275,95 h36
  text "GND" at 1076,68 h36
  text "5V0" at 1754,55 h36
Bottom Overlay:
  lines w6: 2080,738 2092,738 ; 2081,659 2094,659

## Text inside footprints (layer, text, board x,y; h text height)
U5: Bottom Overlay "*" at 1122,1361 h50 r90; Mechanical 1 "*" at 1122,1361 h50 r90
U5-ALT: Mechanical 1 "100" at 1169,1019 h50 r180
U6: Bottom Overlay "*" at 2222,999 h50 r270; Mechanical 1 "*" at 2222,999 h50 r270
U6-ALT: Mechanical 1 "100" at 2153,1337 h50